# Altium PCB ECE453_Interface.PcbDoc
Units mm, origin at the board's own origin, x right, y up, seen from the top; angles counter-clockwise.
Board outline 92.53 x 70.48 mm, 2 copper layers (Top Layer, Bottom Layer); 37 components, 27 nets, 151 pads, 63 vias.
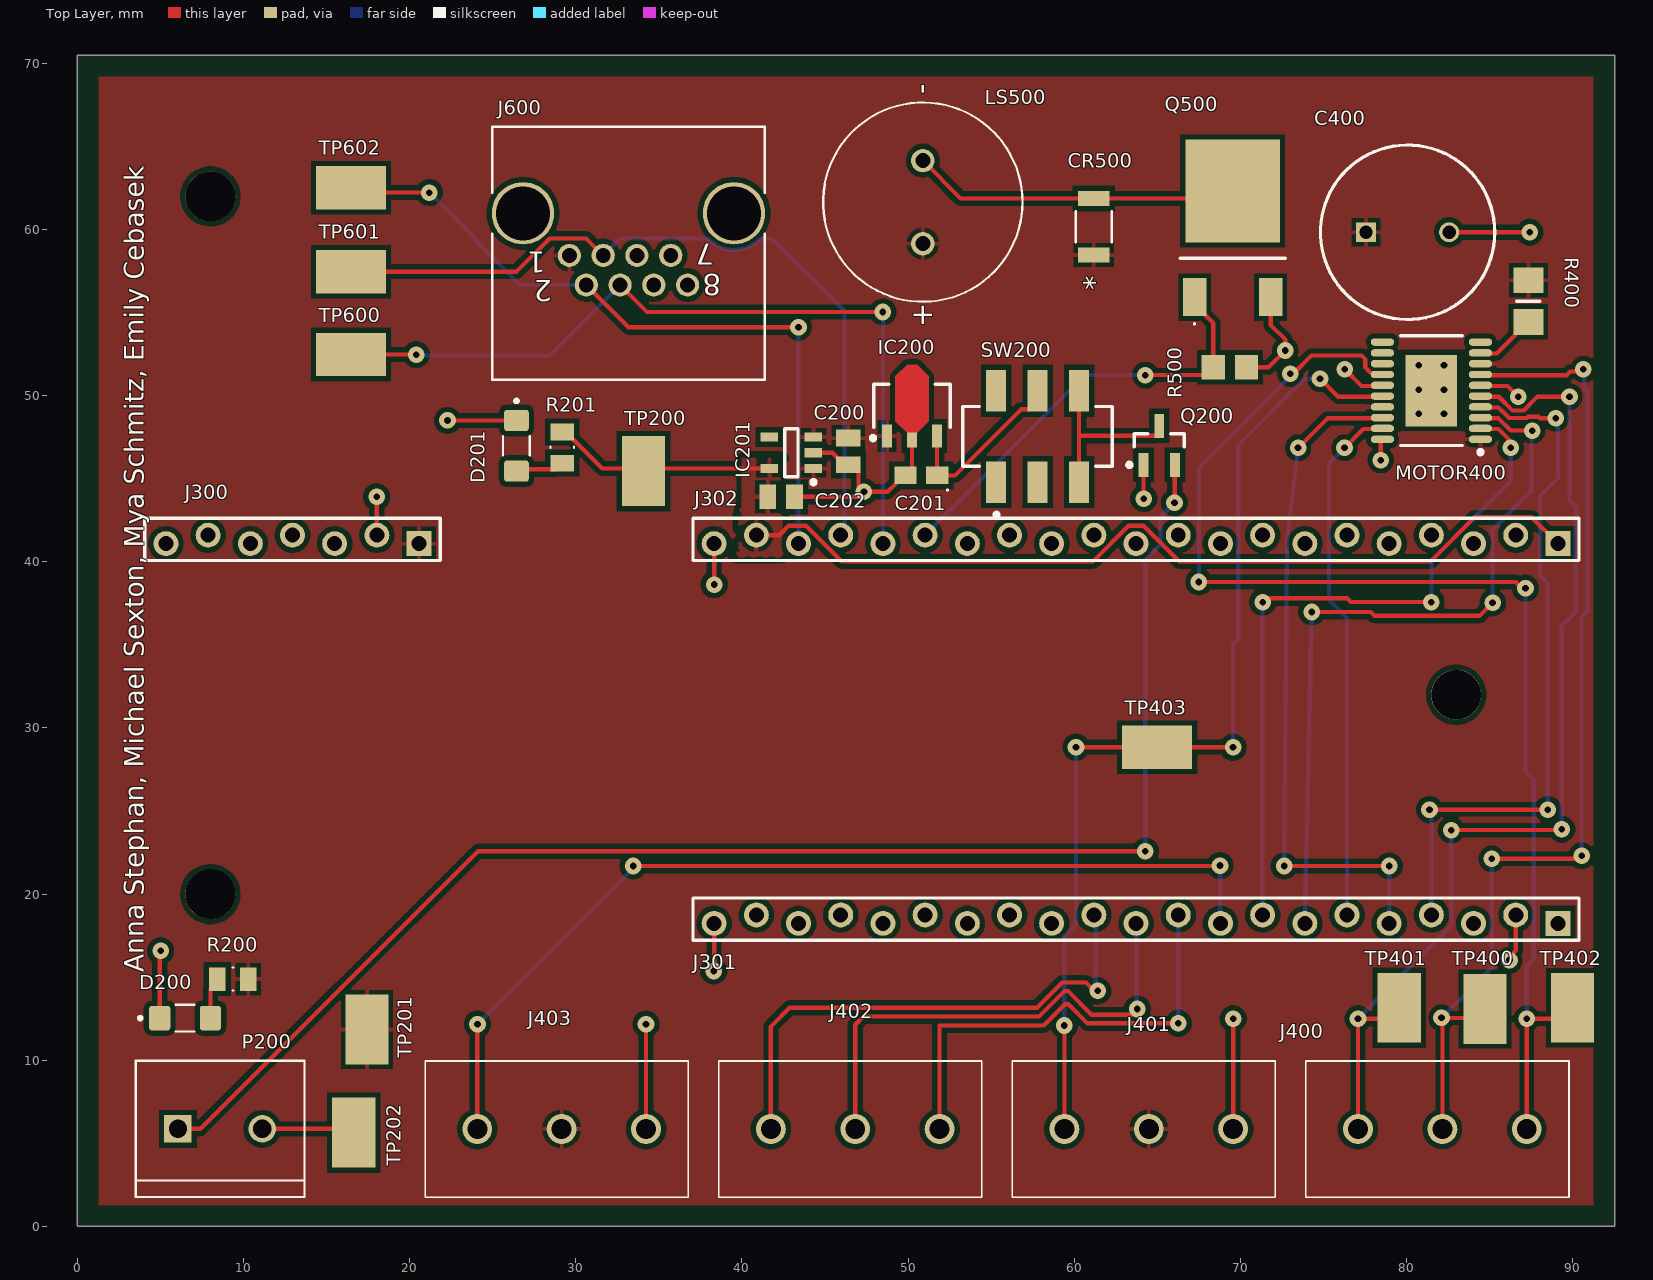
[diagram p0: Top Layer view]
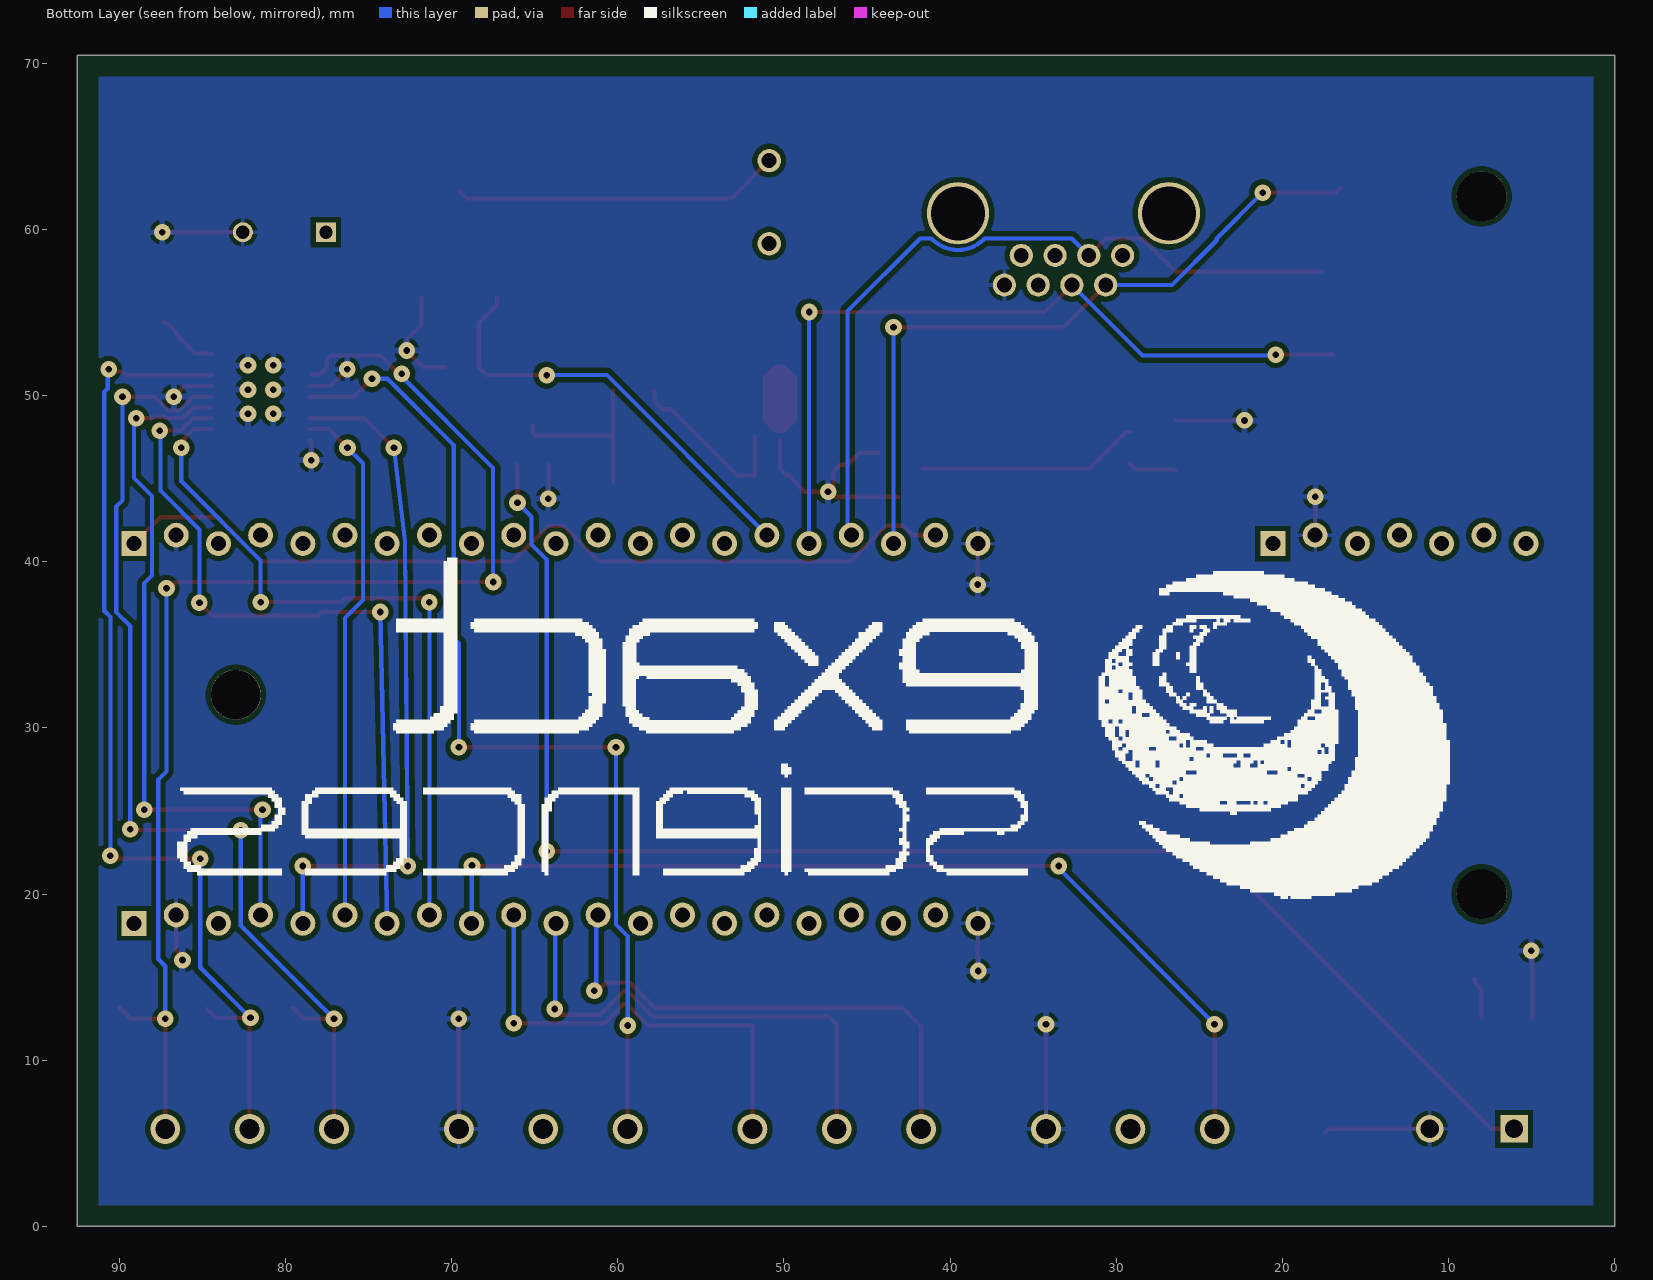
[diagram p1: Bottom Layer view, seen from below]

## Layer stack, top to bottom
Top Solder: solder mask 0.0102, Solder Resist, Dk 3.5
Top Layer: signal copper 0.0356
Dielectric1: dielectric 0.32, FR-4, Dk 4.8
Bottom Layer: signal copper 0.0356
Bottom Solder: solder mask 0.0102, Solder Resist, Dk 3.5

## Board outline
0,0 0,70.485 92.532,70.485 92.532,0

## Design rules (kind name [scope] priority, off if disabled: settings)
BoardOutlineClearance BoardOutlineClearance_1 [IsVia] p1: gap=1.27 ignorepadtopadclearanceinfootprint=FALSE
BoardOutlineClearance [All] p2: gap=1.27 ignorepadtopadclearanceinfootprint=FALSE
Clearance Polygon_Clearance [All vs InPolygon] p1: gap=0.305 ignorepadtopadclearanceinfootprint=FALSE except(0: Arc-Hole Track-Hole SMDPad-Hole THPad-Hole Via-Hole Fill-Hole Poly-Hole Region-Hole Text-Hole)
Clearance [All] p2: gap=0.2 ignorepadtopadclearanceinfootprint=TRUE except(0: Arc-Hole Track-Hole SMDPad-Hole THPad-Hole Via-Hole Fill-Hole Poly-Hole Region-Hole Text-Hole)
ComponentClearance [InComponent('U3')] p1: gap=0 collisioncheckmode=3 verticalgap=0.254 showdistances=FALSE
Height [All] p1: minheight=0 maxheight=22 prefheight=12.7
HoleSize [All] p1: absolutevalues=TRUE maxlimit=6.35 minlimit=0.03 maxpercent=80.000 minpercent=20.000
MinimumAnnularRing MinimumAnnularRing_1 [IsVia] p1: minimumring=0.178
MinimumAnnularRing [All] p2: minimumring=0.178
MinimumSolderMaskSliver [All] p1: minsoldermaskwidth=0.178
NetAntennae NetAntennae_5.0V [InNet('5.0V')] p1: netantennaetolerance=0
NetAntennae NetAntennae_3.3V [InNet('3.3V')] p2: netantennaetolerance=0
PolygonConnect [IsNamedPolygon('5.0V_L01_P019') or IsNamedPolygon('3.3V_L01_P020') vs IsVia] p1: connectstyle=Relief reliefconductorwidth=0.254 reliefentries=4 polygonreliefangle="90 Angle" airgapwidth=0.254
PolygonConnect PolygonConnect_2 [All vs IsVia] p2: connectstyle=Relief reliefconductorwidth=0.381 reliefentries=4 polygonreliefangle="90 Angle" airgapwidth=0.254
PolygonConnect PolygonConnect_1 [All] p3: connectstyle=Relief reliefconductorwidth=0.254 reliefentries=4 polygonreliefangle="90 Angle" airgapwidth=0.254
RoutingVias [All] p1: holewidth=0.711 width=1.27 viastyle="Through Hole" minholewidth=0.381 minwidth=0.635 maxholewidth=0.711 maxwidth=1.27
SolderMaskExpansion [All] p1: expansion=0.102 istentingtop=FALSE
Width [All] p1: maxlimit=12 minlimit=0.1 preferedwidth=0.254 minimp=50.000000 maximp=50.000000 favimp=50.000000
25 further rules are at their usual default settings.

## Classes and differential pairs
component class 06_LEDs: J600 TP600 TP601 TP602
component class 05_Buzzer: CR500 LS500 Q500 R500
component class 04_Motor: C400 J400 J401 J402 J403 MOTOR400 R400 TP400 TP401 TP402 TP403

## Components (designator, comment, footprint, x,y, rotation, side; value= is the part's Value field where it differs from the comment)
C200 "C0805C104K8RACAUTO" CAPC2012X88N 46.406,46.647 r270 top
C201 "TAJR334M020RNJ" CAPM3216X18N 50.8,45.212 r180 top
C202 "C0805C104K8RACAUTO" CAPC2012X88N 42.355,43.917 r0 top
C400 "MAL213668101E3" CAPPRD500W60D1050H1750 77.575,59.842 r0 top
CR500 "CGRM4004-G" CGRM 61.189,60.176 r90 top
D200 "598-8220-107F" LEDSC160X320X90-2N 6.475,12.534 r0 top
D201 "598-8220-107F" LEDSC160X320X90-2N 26.428,46.989 r270 top
IC200 "MC78L05ACHT1G" SOT89-150P415X160-3N 50.241,49.378 r90 top
IC201 "ADP160AUJZ-3.3-R7" TSOT23127P600-8N 42.981,46.568 r180 top
J300 "CONN_HEADER_MALE_1x7" HDR1X7_Stagger 20.564,41.351 r180 top
J301 "CONN_HEADER_MALE_1x21" "HDR1X21 _Stagger" 89.129,18.491 r180 top
J302 "CONN_HEADER_MALE_1x21" "HDR1X21 _Stagger" 89.129,41.351 r180 top
J400 "282837-3" 2828373 77.089,5.854 r0 top
J401 "282837-3" 2828373 59.416,5.854 r0 top
J402 "282837-3" 2828373 41.742,5.854 r0 top
J403 "282837-3" 2828373 24.069,5.854 r0 top
J600 "RJHSE-5080" CONN_RJSBE5080_16P13X12P57_AMP 29.616,58.445 r180 top
LS500 "CPT-1255C-090" CUI_CPT-1255C-090 50.891,61.657 r90 top
MOTOR400 "MPC17529EJ" TSOP65P640X110_HS-21N 81.509,50.306 r180 top
P200 "282837-2" TE_282837-2 8.585,5.867 r0 top
Q200 "SSM3J328R,LF" SOT-23_M 65.126,47.015 r90 top
Q500 "SIHFR120-GE3" SIHFR120GE3 69.545,59.278 r0 top
R200 "1625868-6" RESC2012X65N 9.352,14.884 r0 top
R201 "1625868-6" RESC2012X65N 29.185,46.884 r90 top
R400 "PMR18EZPJ000" RESC3216X42N 87.351,55.697 r270 top
R500 "1614886-1" RES_0805 69.377,51.714 r180 top
SW200 "MHS22204" C&K_Components_0_MFG 57.8,47.556 r0 top
TP200 "TP_1206" TP-SMC-1206 34.068,45.464 r90 top
TP201 "TP_1206" TP-SMC-1206 17.424,11.847 r90 top
TP202 "TP_1206" TP-SMC-1206 16.637,5.639 r90 top
TP400 "TP_1206" TP-SMC-1206 84.735,13.081 r90 top
TP401 "TP_1206" TP-SMC-1206 79.573,13.157 r90 top
TP402 "TP_1206" TP-SMC-1206 90.005,13.157 r90 top
TP403 "TP_1206" TP-SMC-1206 64.995,28.843 r180 top
TP600 "TP_1206" TP-SMC-1206 16.467,52.476 r180 top
TP601 "TP_1206" TP-SMC-1206 16.467,57.47 r180 top
TP602 "TP_1206" TP-SMC-1206 16.467,62.526 r180 top

## Footprints (in the part's own frame and the unit in brackets; to place one, negate y for a bottom-side part, rotate by r counter-clockwise, add the part's x,y. Pads: shape width x height; smd on the part's side, far side on the other; paste and mask are expansions set on the pad)
2828373 [mm]
  round 1.8 hole 1.2: 1(0,0) 2(5.08,0) 3(10.16,0)
  silkscreen extent -3.14,-4.1 12.7,4.1, body extent -3.14,-4.1 12.7,4.1, height 9.97
C&K_Components_0_MFG [mm]
  rect 1.2x2.5 smd paste+0 mask+0: 1(-2.5,-2.75) 2(0,-2.75) 3(2.5,-2.75) 4(-2.5,2.75) 5(0,2.75) 6(2.5,2.75)
  silkscreen extent -4.5,-4.85 4.5,1.8, body extent -4.5,-3.75 4.5,3.75, height 5.51
CAPC2012X88N [mm]
  rect 1.02x1.47 smd: 1(-0.8,0) 2(0.8,0)
  body extent -1,-0.63 1,0.63, height 0.88
CAPM3216X18N [mm]
  rect 1.35x1.05 smd: 1(-0.95,0) 2(0.95,0)
  silkscreen extent -1.62,0.84 -1.52,0.94, body extent -1.13,-0.75 1.12,0.75, height 1.2
CAPPRD500W60D1050H1750 [mm]
  rect 1.2x1.2 hole 0.8: 1(0,0)
  round 1.2 hole 0.8: 2(5,0)
  silkscreen extent -2.75,-5.25 7.75,5.25, body extent -2.75,-5.25 7.75,5.25, height 17.5
CGRM [mil] "diode"
  rect 36x75 smd paste+0 mask+0: 1(-67,0) 2(67,0)
  silkscreen extent -37,-42 37,42, body extent -77,-37 77,37, height 67
CONN_RJSBE5080_16P13X12P57_AMP [mil]
  round 55 hole 35 mask+0: 1(0,0) 2(-40,70) 3(-80,0) 4(-120,70) 5(-160,0) 6(-200,70) 7(-240,0) 8(-280,70)
  round 148 hole 128: 9(-390,-100) 10(110,-100)
  silkscreen extent -463,-305 183,295, body extent 0,0 10,10, height 10
CUI_CPT-1255C-090 [mm]
  round 1.408 hole 0.9: N(2.5,0) P(-2.5,0)
  silkscreen extent -6,-6 6,6
HDR1X7_Stagger [mm]
  rect 1.5x1.5 hole 0.9: 1(0,0.254)
  round 1.5 hole 0.9: 2(2.54,-0.254) 3(5.08,0.254) 4(7.62,-0.254) 5(10.16,0.254) 6(12.7,-0.254) 7(15.24,0.254)
  silkscreen extent -1.27,-1.27 16.51,1.27
"HDR1X21 _Stagger" [mm] "Connector; Header; 10 Position"
  rect 1.5x1.5 hole 0.9: 1(0,0.254)
  round 1.5 hole 0.9: 2(2.54,-0.254) 3(5.08,0.254) 4(7.62,-0.254) 5(10.16,0.254) 6(12.7,-0.254) 7(15.24,0.254) 8(17.78,-0.254) 9(20.32,0.254) 10(22.86,-0.254) 11(25.4,0.254) 12(27.94,-0.254) 13(30.48,0.254) 14(33.02,-0.254) 15(35.56,0.254) 16(38.1,-0.254) 17(40.64,0.254) 18(43.18,-0.254) 19(45.72,0.254) 20(48.26,-0.254) 21(50.8,0.254)
  silkscreen extent -1.27,-1.27 52.07,1.27
LEDSC160X320X90-2N [mm] "Red Clear status LED"
  rrect25% 1.27x1.48 smd: A(1.525,0) C(-1.525,0)
  silkscreen extent -2.8,-0.8 0.57,0.8, body extent -1.6,-0.8 1.6,0.8, height 0.7
RES_0805 [mm]
  rect 1.4x1.5 smd: 1(-1,0) 2(1,0)
  body extent -1.07,-0.7 1.07,0.7, height 0.7
RESC2012X65N [mm]
  rect 1x1.42 smd: 1(-0.935,0) 2(0.935,0)
  silkscreen extent -0.03,-0.7 0.05,0.7
RESC3216X42N [mm]
  rect 1.55x1.8 smd: 1(-1.25,0) 2(1.25,0)
  silkscreen extent 0,-0.7 0,0.7, body extent -1.6,-0.8 1.6,0.8, height 0.42
SIHFR120GE3 [mil]
  rect 55x90 smd: 1(-90,-131.69) 2(90,-131.69)
  rect 224.02x243.31 smd: 3(0,120.24)
  silkscreen extent -125,-197 125,-39
SOT89-150P415X160-3N [mm] "SOT89, 3-Leads, Body 4.50x2.50mm, Pitch 1.50mm, Lead Span 4.2mm, IPC Medium Density"
  rect 1.4x0.6 smd: 1(-1.8,1.5) 3(-1.8,-1.5)
  rect 0.9x0.6 smd: 2(-2.05,0)
  Top Layer region: -1.6,0.3 -0.9,1 1.8,1 2.5,0.3 2.5,-0.3 1.8,-1 -0.9,-1 -1.6,-0.3
  silkscreen extent -2.05,-2.3 1.32,2.47, body extent -1.28,-2.3 1.32,2.3, height 1.6
SOT-23_M [mm] "SOT23, 3-Leads, Body 2.9x1.3mm, Pitch 0.95mm, Lead Span 2.5mm, IPC Low Density"
  rect 1.45x0.6 smd: 1(-1.175,0.95) 2(-1.175,-0.95) 3(1.175,0)
  silkscreen extent -1.3,-1.5 0.7,1.92, body extent -0.7,-1.5 0.7,1.5, height 1.1
TE_282837-2 [mm] "Side entr dual screw down wire"
  rect 1.65x1.65 hole 1.1: 1(-2.54,0)
  round 1.65 hole 1.1: 2(2.54,0)
  silkscreen extent -5.08,-4.1 5.08,4.1, body extent -5.38,-4.01 5.38,4.19, height 7.25
TP-SMC-1206 [mm]
  rect 4.2x2.6 smd mask+0: 1(0,0)
  body extent -1.57,-0.79 1.63,0.81, height 1.22
TSOP65P640X110_HS-21N [mm] "TSOP, 20-Leads, Body 6.50x4.40mm, Pitch 0.65mm, Thermal Pad 4.30x3.10mm, IPC Medium Density"
  oval 1.4x0.45 smd: 1(-2.95,2.925) 2(-2.95,2.275) 3(-2.95,1.625) 4(-2.95,0.975) 5(-2.95,0.325) 6(-2.95,-0.325) 7(-2.95,-0.975) 8(-2.95,-1.625) 9(-2.95,-2.275) 10(-2.95,-2.925) 11(2.95,-2.925) 12(2.95,-2.275) 13(2.95,-1.625) 14(2.95,-0.975) 15(2.95,-0.325) 16(2.95,0.325) 17(2.95,0.975) 18(2.95,1.625) 19(2.95,2.275) 20(2.95,2.925)
  rect 3.1x4.3 smd: 21(0,0)
  silkscreen extent -3.08,-3.3 1.85,3.82, body extent -2.25,-3.3 2.25,3.3, height 1.1
TSOT23127P600-8N [mm]
  rect 1.05x0.55 smd: 1(-1.325,0.95) 2(-1.325,0) 3(-1.325,-0.95) 4(1.325,-0.95) 5(1.325,0.95)
  silkscreen extent -1.45,-1.45 0.4,1.9, body extent -0.8,-1.45 0.8,1.45, height 1

## Part data
C200 C202: "Capacitor", Manufacturer_Name=Kemet, Mouser2 Part Number=80-C0805C104K8RAUTO, Datasheet Link=https://ad.componentsearchengine.com/Datasheets/2/C0805C104K8RACAUTO.pdf, Height=0.88mm, Manufacturer_Part_Number=C0805C104K8RACAUTO
C201: "Capacitor Polarised", Manufacturer_Name=AVX, Mouser2 Part Number=581-TAJR334M020RNJ, Supplier Part Number 1=1358610, Height=1.2mm, Manufacturer_Part_Number=TAJR334M020RNJ, Supplier 1=RSComponents
C400: "Capacitor Polarised", Manufacturer_Name=Vishay, Mouser2 Part Number=594-MAL213668101E3, Datasheet Link=https://componentsearchengine.com//MAL213668101E3.pdf, Height=17.5mm, Manufacturer_Part_Number=MAL213668101E3, Mouser2 Price/Stock=https://www.mouser.com/Search/Refine.aspx?Keyword=N%2FA
CR500: "No Description Available", Mfr_Name=Comchip, Copyright="Copyright (C) 2022 Ultra Librarian. All rights reserved.", Digi-Key_Part_Number_1=641-1329-1-ND, Digi-Key_Part_Number_2=641-1329-2-ND, Digi-Key_Part_Number_3=641-1329-2-NDL, Digi-Key_Part_Number_4=641-1329-6-ND, Manufacturer_Part_Number=CGRM4004-G, RefDes=RefDes, Type=DEV
D200 D201: "Red 625nm LED Indication - Discrete 2V 1206 _3216 Metric_", Package="1206 Dialight", MF=Dialight, MP=598-8220-107F, SnapEDA_Link=https://www.snapeda.com/parts/598-8220-107F/Dialight/view-part/454138/?ref=snap
IC200: "Integrated Circuit", Manufacturer_Name="ON Semiconductor", Mouser2 Part Number=863-MC78L05ACHT1G, Datasheet Link=https://componentsearchengine.com//MC78L05ACHT1G.pdf, Manufacturer_Part_Number=MC78L05ACHT1G, Mouser2 Price/Stock=https://www.mouser.com/Search/Refine.aspx?Keyword=863-MC78L05ACHT1G
IC201: library part ADP160AUJZ-3.0-R7, "Integrated Circuit", Manufacturer_Name="Analog Devices", Mouser2 Part Number=584-ADP160AUJZ-3.3R7, Datasheet Link=https://componentsearchengine.com/Datasheets/2/ADP160AUJZ-3.0-R7.pdf, Height=1mm, Manufacturer_Part_Number=ADP160AUJZ-3.0-R7
J300: "Header, 7-Pin", ComponentLink1Description=http://www.farnell.com/cad/1737268.pdf, ComponentLink1URL=http://www.farnell.com/cad/1737268.pdf, ComponentLink2Description=http://katalog.we-online.de/em/datasheet/6130xx11121.pdf, ComponentLink2URL=http://katalog.we-online.de/em/datasheet/6130xx11121.pdf, ComponentLink3Description=https://datasheet.ciiva.com/741/xrxczzzsxxn-rc-st-11635-b-741840.pdf?src-supplier=Digi-Key, ComponentLink3URL=https://datasheet.ciiva.com/741/xrxczzzsxxn-rc-st-11635-b-741840.pdf?src-supplier=Digi-Key
J301 J302: "Header, 21-Pin", ComponentLink1Description=http://www.farnell.com/cad/1737268.pdf, ComponentLink1URL=http://www.farnell.com/cad/1737268.pdf, ComponentLink2Description=http://katalog.we-online.de/em/datasheet/6130xx11121.pdf, ComponentLink2URL=http://katalog.we-online.de/em/datasheet/6130xx11121.pdf, ComponentLink3Description=https://datasheet.ciiva.com/741/xrxczzzsxxn-rc-st-11635-b-741840.pdf?src-supplier=Digi-Key, ComponentLink3URL=https://datasheet.ciiva.com/741/xrxczzzsxxn-rc-st-11635-b-741840.pdf?src-supplier=Digi-Key
J400 J401 J402 J403: "Connector", Manufacturer_Name="TE Connectivity", Mouser2 Part Number=571-2828373, Height=10.3mm, Manufacturer_Part_Number=282837-3
J600: "Jack Modular Connector 8p8c (RJ45, Ethernet) 90Â° Angle (Right) Unshielded", Digikey Part No.=RJHSE-5080-ND, Manufacturer="Amphenol CS (Commercial Products)", Package=None, Digi-Key_Part_Number=RJHSE-5080-ND, Manufacturer Part No.=RJHSE-5080, MF="Amphenol Commercial Products", MP=RJHSE-5080, SnapEDA_Link=https://www.snapeda.com/parts/RJHSE-5080/Amphenol/view-part/4796273/?ref=snap
LS500: "12 mm, 20 Vp-p, 80 dB, Through Hole, Piezo Audio Transducer Buzzer", Digikey Part No.=102-3752-ND, Manufacturer="CUI Devices", Availability=Unavailable, Manufacturer Part No.=CPT-1255C-090, MF="CUI Devices", MP=CPT-1255C-090, Price=None, SnapEDA_Link=https://www.snapeda.com/parts/CPT-1255C-090/CUI%20Devices/view-part/2202985/?ref=snap
MOTOR400: library part SOP65P64X1, "Dual Motor Driver", Digikey Part No.=568-13356-ND, Manufacturer="NXP USA Inc.", Manufacturer Part No.=MPC17529EJ
P200: "Connector Terminal Blocks Receptacle 2 Position 5.08mm Solder Straight Thru-Hole 13.5A/Contact", Digikey Part No.=A113320-ND, Manufacturer="TE Connectivity AMP Connectors", Package=None, Availability=Good, Check_prices=https://www.snapeda.com/parts/282837-2/TE%20Connectivity%20AMP%20Connectors/view-part/2549980/?ref=eda, Manufacturer Part No.=282837-2, MF="TE Connectivity", MP=282837-2, Price=None, Purchase-URL=https://pricing.snapeda.com/search/part/282837-2/?ref=eda, SnapEDA_Link=https://www.snapeda.com/parts/282837-2/TE%20Connectivity%20AMP%20Connectors/view-part/2549980/?ref=snap
Q200: "MOSFET P-CH 20V 6A SOT23F", Case/Package=SOT-23-3, Continuous Drain Current (ID)=6A, Drain to Source Breakdown Voltage=-20V, Drain to Source Resistance=47.4mR, Drain to Source Voltage (Vdss)=20V, Gate to Source Voltage (Vgs)=8V, Input Capacitance=840pF, Manufacturer 1=Toshiba, Max Operating Temperature=150°C, Max Power Dissipation=1W, Min Operating Temperature=-55°C, Package Quantity=3000, Power Dissipation=2W, Supplier Part Number 1=SSM3J328RLFCT-ND, Category=MOSFETs, ComponentLink1Description=https://datasheet.ciiva.com/11158/ssm3j328r-datasheet-en-20140301-11158652.pdf?src-supplier=Avnet, ComponentLink1URL=https://datasheet.ciiva.com/11158/ssm3j328r-datasheet-en-20140301-11158652.pdf?src-supplier=Avnet, ComponentLink2Description=https://datasheet.ciiva.com/24106/ssm3j328r-datasheet-en-20140301-24106699.pdf?src-supplier=Mouser, ComponentLink2URL=https://datasheet.ciiva.com/24106/ssm3j328r-datasheet-en-20140301-24106699.pdf?src-supplier=Mouser, ComponentLink3Description=https://datasheet.ciiva.com/45425/ssm3j328r-datasheet-en-20140301-45425519.pdf?src-supplier=Digi-Key, ComponentLink3URL=https://datasheet.ciiva.com/45425/ssm3j328r-datasheet-en-20140301-45425519.pdf?src-supplier=Digi-Key, ComponentLink4Description=https://datasheet.ciiva.com/45425/ssm3j328r-datasheet-en-20140301-45425813.pdf?src-supplier=Digi-Key, ComponentLink4URL=https://datasheet.ciiva.com/45425/ssm3j328r-datasheet-en-20140301-45425813.pdf?src-supplier=Digi-Key, Element Configuration=Single, Manufacturer Part Number 1=SSM3J328R,LF, Mount="Surface Mount", Number of Channels=1, Number of Elements=1, Number of Pins=3, Packaging="Tape and Reel", Polarity=P-CHANNEL, Pricing 1="1=0.43000, 10=0.32200, 25=0.29040, 100=0.20060, 500=0.13728, 1000=0.10560 (USD)", Radiation Hardening=No, Rds On Max=29.8mR, RoHS=Yes, RoHS Compliant=Yes, Stock 1=476474, Supplier 1=Digi-Key, Turn-Off Delay Time=107ns, Turn-On Delay Time=32ns
Q500: "MOSFET (N-Channel)", Manufacturer_Name=Vishay, Mouser2 Part Number=78-SIHFR120-GE3, Datasheet Link=https://www.mouser.in/datasheet/2/427/91266-1768752.pdf, Height=2.38mm, Manufacturer_Part_Number=SIHFR120-GE3
R200 R201: "Resistor 0805 200R 0.1% 25ppm (reel)", Package=None, Availability=Unavailable, MP=1625868-6, Price=None
R400: "Resistor", Manufacturer_Name="ROHM Semiconductor", Mouser2 Part Number=755-PMR18EZPJ000, Datasheet Link=https://fscdn.rohm.com/en/products/databook/datasheet/passive/resistor/chip_resistor/pmr-jpw-e.pdf, Height=0.42mm, Manufacturer_Part_Number=PMR18EZPJ000
R500: "CPF0805 10K 0.1% 25PPM 5K RL", Package=0805, Power_Rating=".1 W", Resistance=10K, Tolerance=.1%, Voltage_Rating="100 V", Availability=Warning, Check_prices=https://www.snapeda.com/parts/1614886-1/TE%20Connectivity/view-part/2202344/?ref=eda, EU_RoHS_Compliance=Compliant, MF="TE Connectivity", MP=1614886-1, Price=None, SnapEDA_Link=https://www.snapeda.com/parts/1614886-1/TE%20Connectivity/view-part/2202344/?ref=snap
SW200: library part JS202011SCQN, "C & K COMPONENTS - JS202011SCQN - SWITCH, DPDT, 0.6A, 6VDC, SMD", Actuator Color=Black, Contact Current Rating=300mA, Contact Resistance=70mR, Flammability Rating="UL94 V-2", Manufacturer 1="TE Connectivity", Max Operating Temperature=85°C, Max Voltage Rating (DC)=6V, Min Operating Temperature=-20°C, Package Quantity=1, Supplier Part Number 1=506-MHS22204, Actuator Length=2mm, Actuator Material=Nylon,Polyamide,PA46, Actuator Type=Standard, Category="Slide Switches", Contact Material="Copper Alloy", Contact Plating=Silver, Current Rating=300mA, Depth=7.5mm, Electrical Life=5000Cycles, Housing Material=Nylon, Lead Free="Lead Free", Length=9mm, Manufacturer Part Number 1=MHS22204, Max Current Rating=300mA, Mount="Surface Mount", Orientation=Vertical, Packaging="Tape and Reel", Pricing 1="1=0.55000, 10=0.53000, 25=0.51040, 100=0.44180, 250=0.40252, 500=0.37306 (USD)", Radiation Hardening=No, REACH SVHC="No SVHC", RoHS=Yes, Series=JS, Stock 1=21096, Supplier 1=Mouser, Switch Function=On-On, Switch Travel=2mm, Termination="Gull Wing", Throw Configuration=DPDT, Voltage Rating (DC)=6V
TP200 TP201 TP202 TP400 TP401 TP402 TP403 TP600 TP601 TP602: "Test Point SMD 1206", Case Size=1206, Manufacturer="TE Connectivity (Tyco Electronics)", Manufacturer Part Number=1625854-1, Operating Temperature="-55 to 125 C", Power Rating=N/R, Resistance Value="0 Ohm", Supplier Part Number=A106143CT-ND, ComponentLink1Description=https://datasheet.ciiva.com/6439/eng-ds-1773266-a-6439169.pdf, ComponentLink1URL=https://datasheet.ciiva.com/6439/eng-ds-1773266-a-6439169.pdf, ComponentLink2Description=https://datasheet.ciiva.com/30136/1773266-a-30136341.pdf, ComponentLink2URL=https://datasheet.ciiva.com/30136/1773266-a-30136341.pdf, ComponentLink3Description=https://datasheet.ciiva.com/6439/eng-ds-1773266-a-6439080.pdf, ComponentLink3URL=https://datasheet.ciiva.com/6439/eng-ds-1773266-a-6439080.pdf, ComponentLink4Description=https://datasheet.ciiva.com/6439/eng-ds-1773266-a-6439081.pdf, ComponentLink4URL=https://datasheet.ciiva.com/6439/eng-ds-1773266-a-6439081.pdf, ComponentLink5Description=https://datasheet.ciiva.com/6439/eng-ds-1773266-a-6439083.pdf, ComponentLink5URL=https://datasheet.ciiva.com/6439/eng-ds-1773266-a-6439083.pdf, Dimension="3.2 x 1.6 x 1.25mm", Family=RC, Mounting="Surface Mount", Packaging="Tape and Reel", Part No=1625854-1, Pricing 1="1=0.28, 10=0.261, 25=0.224, 50=0.1902, 100=0.1828, 250=0.1641, 500=0.1567, 1000=0.1306 (USD)", RoHS=Yes, Stock 1=31937, Supplier=Digi-Key, Temperature Coefficient=N/R, Terminal Pitch=N/R, Termination Style=N/R, Tolerance=N/R

## Free pads (board coordinates)
  round 3 hole 3: mount1(83,32) mount2(8,20) mount3(8,62)

## Via types
v1: diameter 1, hole 0.4, Top Layer to Bottom Layer, 63 vias

## Nets (pads, with @x,y where several pads share a name; then routed paths per layer and width w, separated by ;. In a path a pad name is that pad's centre, name@x,y a point inside that pad or via, vN(x,y) a via of type N, cw(c..) or ccw(c..) an arc to the next point about the centre after c; other vN are vias at no path point)
3.3V_MCU: C202.1 IC201.5 J302.1 J302.20 R201.2 TP200.1 | length 66.3
  Top Layer w0.254: R201.2 29.395,47.819 31.595,45.618 IC201.5 ; J302.20 42.246,41.605 42.815,42.174 43.856,42.174 46.01,40.02 61.127,40.02 63.281,42.174 64.176,42.174 66.33,40.02 81.447,40.02 84.109,42.682 87.544,42.682 J302.1
5.0V: C200.1 C400.1 CR500.1 IC200.1 IC201.1 IC201.3 J300.1 J401.2 J403.2 J600.1 LS500.P MOTOR400.1 MOTOR400.8 MOTOR400.17 R200.2 R400.1 TP201.1
BUZZER_Q: CR500.2 LS500.N Q500.3 | length 19.8
  Top Layer w0.254: LS500.N 53.17,61.878 CR500.2 69.092,61.878 Q500.3
CRES_RES0: MOTOR400.9 R400.2 | length 3.8
  Top Layer w0.254: MOTOR400.9@84.459,52.542 85.445,52.542 86.578,53.674 86.578,53.799 87.226,54.447 R400.2
GND: C200.2 C201.2 C202.2 C400.2 D200.C D201.C IC200.2 IC201.2 J300.2 J301.2 J301.21 J302.2 J302.21 J401.3 J403.3 J600.8 MOTOR400.6 MOTOR400.15 MOTOR400.20 MOTOR400.21 P200.2 Q200.1 Q500.2 R500.1 TP202.1 | length 71.8
  Top Layer w0.254: D200.C 4.95,16.532 v1@5.055,16.637 ; P200.2 17.196,5.867 TP202.1@17.424,5.639 ; v1(18.009,43.917) 18.016,43.909 18.016,41.613 J300.2 ; v1(22.276,48.514) D201.C ; J403.3 v1(34.229,12.167) ; v1(38.303,15.367) 38.329,15.392 J301.21 ; v1(38.329,38.633) J302.21 ; C202.2 46.947,43.917 47.252,44.221 v1(47.346,44.221) ; IC201.2 45.46,46.568 46.181,45.847 C200.2 46.631,45.847 47.014,45.464 47.014,44.553 v1(47.346,44.221) ; IC200.2 50.241,45.603 C201.2 49.7,45.212 49.302,44.814 49.302,44.757 48.766,44.221 v1(47.346,44.221) ; Q200.1 64.176,43.825 v1(64.193,43.807) v1@64.211,43.79 ; J401.3 v1(69.576,12.497) ; R500.1 71.704,51.714 v1(72.717,52.727) 72.717,53.379 71.831,54.264 Q500.2 ; v1(76.29,51.596) 77.294,50.592 MOTOR400.15@78.559,50.592 ; v1(78.461,46.126) 78.461,47.251 78.551,47.342 MOTOR400.20@78.559,47.342 ; C400.2 v1(87.427,59.842) ; MOTOR400.6@84.459,50.592 86.082,50.592 v1(86.727,49.946) ; v1@86.233,16.256 86.589,16.612 J301.2
  other v1: 86.208,16.027 5.002,16.585 80.747,48.909 82.271,48.909 80.747,50.369 82.271,50.369 80.747,51.83 82.271,51.83
MOTOR1_+: J400.2 MOTOR400.7 TP400.1 | length 61.8
  Top Layer w0.254: J400.2 82.169,12.497 v1(82.118,12.548) 84.202,12.548 TP400.1 ; MOTOR400.7@84.459,51.242 84.464,51.237 89.648,51.237 89.865,51.453 90.514,51.453 v1(90.656,51.596) ; v1(85.141,22.123) 90.373,22.123 v1(90.551,22.301)
  Bottom Layer w0.254: v1(82.118,12.548) 85.141,15.57 v1(85.141,22.123) ; v1(90.551,22.301) 90.551,36.684 90.921,37.054 90.921,50.224 90.717,50.428 90.717,51.535 v1(90.656,51.596)
MOTOR1_-: J400.3 MOTOR400.14 TP402.1 | length 77
  Top Layer w0.254: v1(67.513,38.786) 86.59,38.786 86.971,38.405 v1(87.173,38.405) ; v1(73.014,51.329) 73.188,51.329 74.282,52.423 77.3,52.423 77.532,52.191 77.532,51.702 77.855,51.379 77.933,51.379 78.02,51.291 MOTOR400.14@78.509,51.291 ; J400.3 87.249,12.192 v1@87.274,12.217 ; v1(87.249,12.497) 89.345,12.497 TP402.1
  Bottom Layer w0.254: v1(67.513,38.786) 67.513,45.654 73.014,51.155 v1(73.014,51.329) ; v1(87.173,38.405) 87.173,27.385 87.666,26.892 87.666,16.074 87.249,15.658 v1(87.249,12.497)
MOTOR2_+: J400.1 MOTOR400.5 TP401.1 | length 62.1
  Top Layer w0.254: J400.1 v1@77.089,12.217 ; v1(77.089,12.497) 78.913,12.497 TP401.1 ; v1(82.702,23.851) 89.256,23.851 v1@89.332,23.927 ; MOTOR400.5@84.459,49.942 85.562,49.942 86.385,49.119 87.07,49.119 87.897,49.946 v1(89.824,49.946)
  Bottom Layer w0.254: v1(77.089,12.497) 82.702,18.11 v1(82.702,23.851) ; v1(89.357,23.901) 89.357,36.132 90.206,36.981 90.206,43.314 89.824,43.696 v1(89.824,49.946)
MOTOR2_-: J401.1 MOTOR400.16 TP403.1 | length 61.9
  Top Layer w0.254: v1(59.411,12.09) 59.416,12.085 J401.1 ; v1(60.112,28.843) 69.561,28.843 v1@69.576,28.829 ; v1(74.803,51.028) 75.889,49.942 MOTOR400.16@78.559,49.942
  Bottom Layer w0.254: v1(59.411,12.09) 59.411,17.476 60.112,18.177 v1(60.112,28.843) ; v1(69.568,28.836) 69.568,35.078 69.886,35.395 69.886,47.031 73.883,51.028 v1(74.803,51.028)
NetD200_A: D200.A R200.1 | length 2.5
  Top Layer w0.254: D200.A 8,14.257 8.417,14.674 R200.1
NetD201_A: D201.A R201.1 | length 3
  Top Layer w0.254: D201.A 26.539,45.576 28.812,45.576 R201.1
P5_2_BUZZER: J302.16 Q500.1 R500.2 | length 26.2
  Top Layer w0.254: v1(64.287,51.242) 67.904,51.242 R500.2 68.377,54.371 67.259,55.488 Q500.1
  Bottom Layer w0.254: J302.16 60.665,51.242 v1(64.287,51.242)
P5_5_MOTOR1_ENCODER_A: J301.12 J402.1 | length 31.8
  Top Layer w0.254: J402.1 41.742,12.03 42.87,13.157 57.76,13.157 59.284,14.681 60.707,14.681 61.215,14.173 v1(61.417,14.173)
  Bottom Layer w0.254: J301.12 61.303,18.631 61.303,14.287 v1(61.417,14.173)
P5_6_MOTOR1_ENCODER_B: J301.11 J402.2 | length 30
  Top Layer w0.254: J402.2 46.822,12.131 47.315,12.624 57.887,12.624 59.42,14.157 59.63,14.157 61.051,12.736 63.46,12.736 v1(63.805,13.081)
  Bottom Layer w0.254: J301.11 63.767,18.199 63.767,13.119 v1(63.805,13.081)
P9_0_LED_RED: J302.19 J600.2 TP602.1 | length 43.5
  Top Layer w0.254: TP602.1 16.763,62.23 v1(21.184,62.23) ; J600.2 33.172,54.127 v1(43.409,54.127)
  Bottom Layer w0.254: v1(21.184,62.23) 23.946,59.467 23.946,59.364 26.643,56.667 J600.2 ; J302.19 v1(43.409,54.127)
P9_1_LED_GREEN: J302.18 J600.3 TP601.1 | length 46
  Top Layer w0.254: TP601.1@17.617,57.47 26.428,57.47 28.429,59.471 30.623,59.471 J600.3
  Bottom Layer w0.254: J600.3 32.674,59.471 37.916,59.471 37.962,59.425 ccw(c39.522,60.985) 41.082,59.424 41.129,59.471 41.799,59.471 46.177,55.093 46.177,41.834 J302.18
P9_2_LED_BLUE: J302.17 J600.4 TP600.1 | length 48
  Top Layer w0.254: TP600.1@16.942,52.476 v1@20.358,52.476 ; J600.4 34.29,55.042 v1(48.489,55.042)
  Bottom Layer w0.254: v1@20.396,52.426 28.423,52.426 J600.4 ; v1@48.438,55.093 v1(48.489,55.042) J302.17
  other v1: 20.396,52.476
P10_0_MOTOR2_ENCODER_A: J301.10 J402.3 | length 28.1
  Top Layer w0.254: J402.3 51.902,12.095 58.173,12.095 59.444,13.366 59.654,13.366 60.803,12.217 v1(66.269,12.217)
  Bottom Layer w0.254: v1(66.269,12.217) J301.10
P10_1_MOTOR2_ENCODER_B: J301.9 J403.1 | length 58.6
  Top Layer w0.254: J403.1 24.069,12.156 v1(24.079,12.167) ; v1(33.452,21.692) 68.758,21.692 v1(68.783,21.717) v1@68.809,21.742
  Bottom Layer w0.254: v1(24.079,12.167) 33.452,21.539 v1(33.452,21.692) ; v1(68.783,21.717) 68.796,21.704 68.796,18.25 J301.9
P10_2_MOTOR1_INA: J301.8 MOTOR400.2 | length 43
  Top Layer w0.254: v1(71.349,37.578) 71.55,37.578 71.78,37.808 76.429,37.808 76.658,37.578 v1(81.509,37.578) ; MOTOR400.2@84.459,47.992 85.54,47.992 86.141,47.39 86.141,47.006 v1(86.284,46.863)
  Bottom Layer w0.254: J301.8 v1(71.349,37.578) ; v1(81.509,37.578) 81.509,40.082 86.284,44.857 v1(86.284,46.863)
P10_3_MOTOR1_INB: J301.7 MOTOR400.3 | length 44.8
  Top Layer w0.254: v1(74.308,36.981) 77.856,36.981 78.086,36.751 84.401,36.751 v1(85.192,37.541) ; MOTOR400.3@84.459,48.642 85.548,48.642 86.285,47.904 v1(87.581,47.904)
  Bottom Layer w0.254: J301.7 v1(74.308,36.981) ; v1(85.192,37.541) 85.192,41.935 87.544,44.287 87.544,47.866 v1(87.581,47.904)
P10_4_MOTOR2_INA: J301.6 MOTOR400.19 | length 31.7
  Top Layer w0.254: v1(76.276,46.863) 77.405,47.992 MOTOR400.19@78.559,47.992
  Bottom Layer w0.254: v1(76.276,46.863) 75.352,45.938 75.352,37.704 76.429,36.627 J301.6
P10_5_MOTOR2_INB: J301.5 MOTOR400.18 | length 40.8
  Top Layer w0.254: v1(72.644,21.692) v1(78.969,21.692) ; v1(73.481,46.863) 75.26,48.642 MOTOR400.18@78.559,48.642
  Bottom Layer w0.254: v1(72.644,21.692) 72.812,41.106 cw(c73.889,41.097) 72.819,41.222 v1(73.481,46.863) ; J301.5 v1(78.969,21.692) v1@78.969,21.717
P10_6_MOTOR_OEn: J301.4 MOTOR400.4 | length 42.8
  Top Layer w0.254: v1(81.394,25.083) 88.379,25.083 v1@88.519,25.222 ; MOTOR400.4@84.459,49.292 85.54,49.292 85.761,49.07 85.792,49.07 86.197,48.665 87.258,48.665 87.324,48.731 87.974,48.731 88.063,48.642 v1(88.997,48.642)
  Bottom Layer w0.254: v1@81.28,25.197 v1(81.394,25.083) 81.509,24.968 J301.4 ; v1(88.519,25.083) 88.519,38.707 88.052,39.175 88.052,43.97 89.129,45.047 89.129,48.51 v1(88.997,48.642)
VBAT_A: Q200.3 SW200.3 SW200.6 | length 10.8
  Top Layer w0.254: SW200.3 60.3,47.556 ; SW200.6 60.3,47.556 ; Q200.3 65.126,47.765 64.953,47.592 60.336,47.592 60.3,47.556
VBAT_POS: P200.1 Q200.2 | length 89.2
  Top Layer w0.254: P200.1 7.391,5.867 24.105,22.581 v1(64.287,22.581) ; v1(66.04,43.561) 66.058,43.579 66.058,45.823 Q200.2
  Bottom Layer w0.254: v1(64.287,22.581) 64.287,40.133 65.192,41.037 65.192,42.713 v1(66.04,43.561)
VIN: C201.1 IC200.3 SW200.5 | length 10.9
  Top Layer w0.254: C201.1 IC200.3@51.75,47.569 ; C201.1@51.759,45.203 52.818,45.203 56.798,49.183 57.327,49.183 57.8,49.656 SW200.5
pads on no net: IC201.4 J300.3 J300.4 J300.5 J300.6 J300.7 J301.1 J301.3 J301.13 J301.14 J301.15 J301.16 J301.17 J301.18 J301.19 J301.20 J302.3 J302.4 J302.5 J302.6 J302.7 J302.8 J302.9 J302.10 J302.11 J302.12 J302.13 J302.14 J302.15 J600.5 J600.6 J600.7 J600.9 J600.10 MOTOR400.10 MOTOR400.11 MOTOR400.12 MOTOR400.13 SW200.1 SW200.2 SW200.4

## Polygon pours and split planes (outlines as drawn)
5.0V on Top Layer "5.0V_TOP" (solid, pour order 10): 0.686,69.545 1.524,70.383 92.939,70.383 92.939,0.66 92.253,-0.025 -0.965,-0.025
3.3V_MCU on Top Layer "3.3V_TOP" (solid, pour order 3): 42.418,46.253 42.418,40.335 39.878,40.335 39.713,40.5 40.005,40.792 40.005,46.253
3.3V_MCU on Top Layer "3.3V_MCU_L01_P001" (hatched 45Degree grid 0.508 track 0.203, pour order 1): 40.691,46.253 42.418,46.253 42.418,40.335 39.599,40.335 39.573,40.361 39.853,40.64 39.853,42.697
GND on Bottom Layer "GND" (solid, pour order 8): 0.051,70.51 0.076,70.485 92.532,70.485 92.532,0 0,0

## Silkscreen, mask and mechanical layers (free items; w line width, h text height)
Top Overlay:
  text "Anna Stephan, Michael Sexton, Mya Schmitz, Emily Cebasek" at 4.369,15.291 h2 r90
Bottom Overlay:
  drawing of 26 lines, arcs and shapes, not listed

## Text inside footprints (layer, text, board x,y; h text height)
CR500: Top Overlay "*" at 61.836,56.363 h1.27 r90; Mechanical 13 "*" at 61.824,58.462 h1.27 r90
J600: Top Overlay "1" at 28.194,58.674 h1.27 r180; Top Overlay "2" at 28.575,56.947 h1.27 r180; Top Overlay "7" at 38.329,59.157 h1.27 r180; Top Overlay "8" at 38.752,57.302 h1.27 r180; Mechanical 13 "1" at 28.537,59.08 h1.27 r180; Mechanical 13 "2" at 28.537,57.302 h1.27 r180; Mechanical 13 "7" at 38.443,59.08 h1.27 r180; Mechanical 13 "8" at 38.443,57.302 h1.27 r180
LS500: Top Overlay "-" at 51.384,68.148 h1.27 r90; Top Overlay "+" at 51.463,54.132 h1.27 r90